# Altium PCB PCB1.PcbDoc
Units mil, origin at the board's own origin, x right, y up, seen from the top; angles counter-clockwise.
Board outline 2150 x 1580 mil, 2 copper layers (Top Layer, Bottom Layer); 11 components, 8 nets, 25 pads, 0 vias.
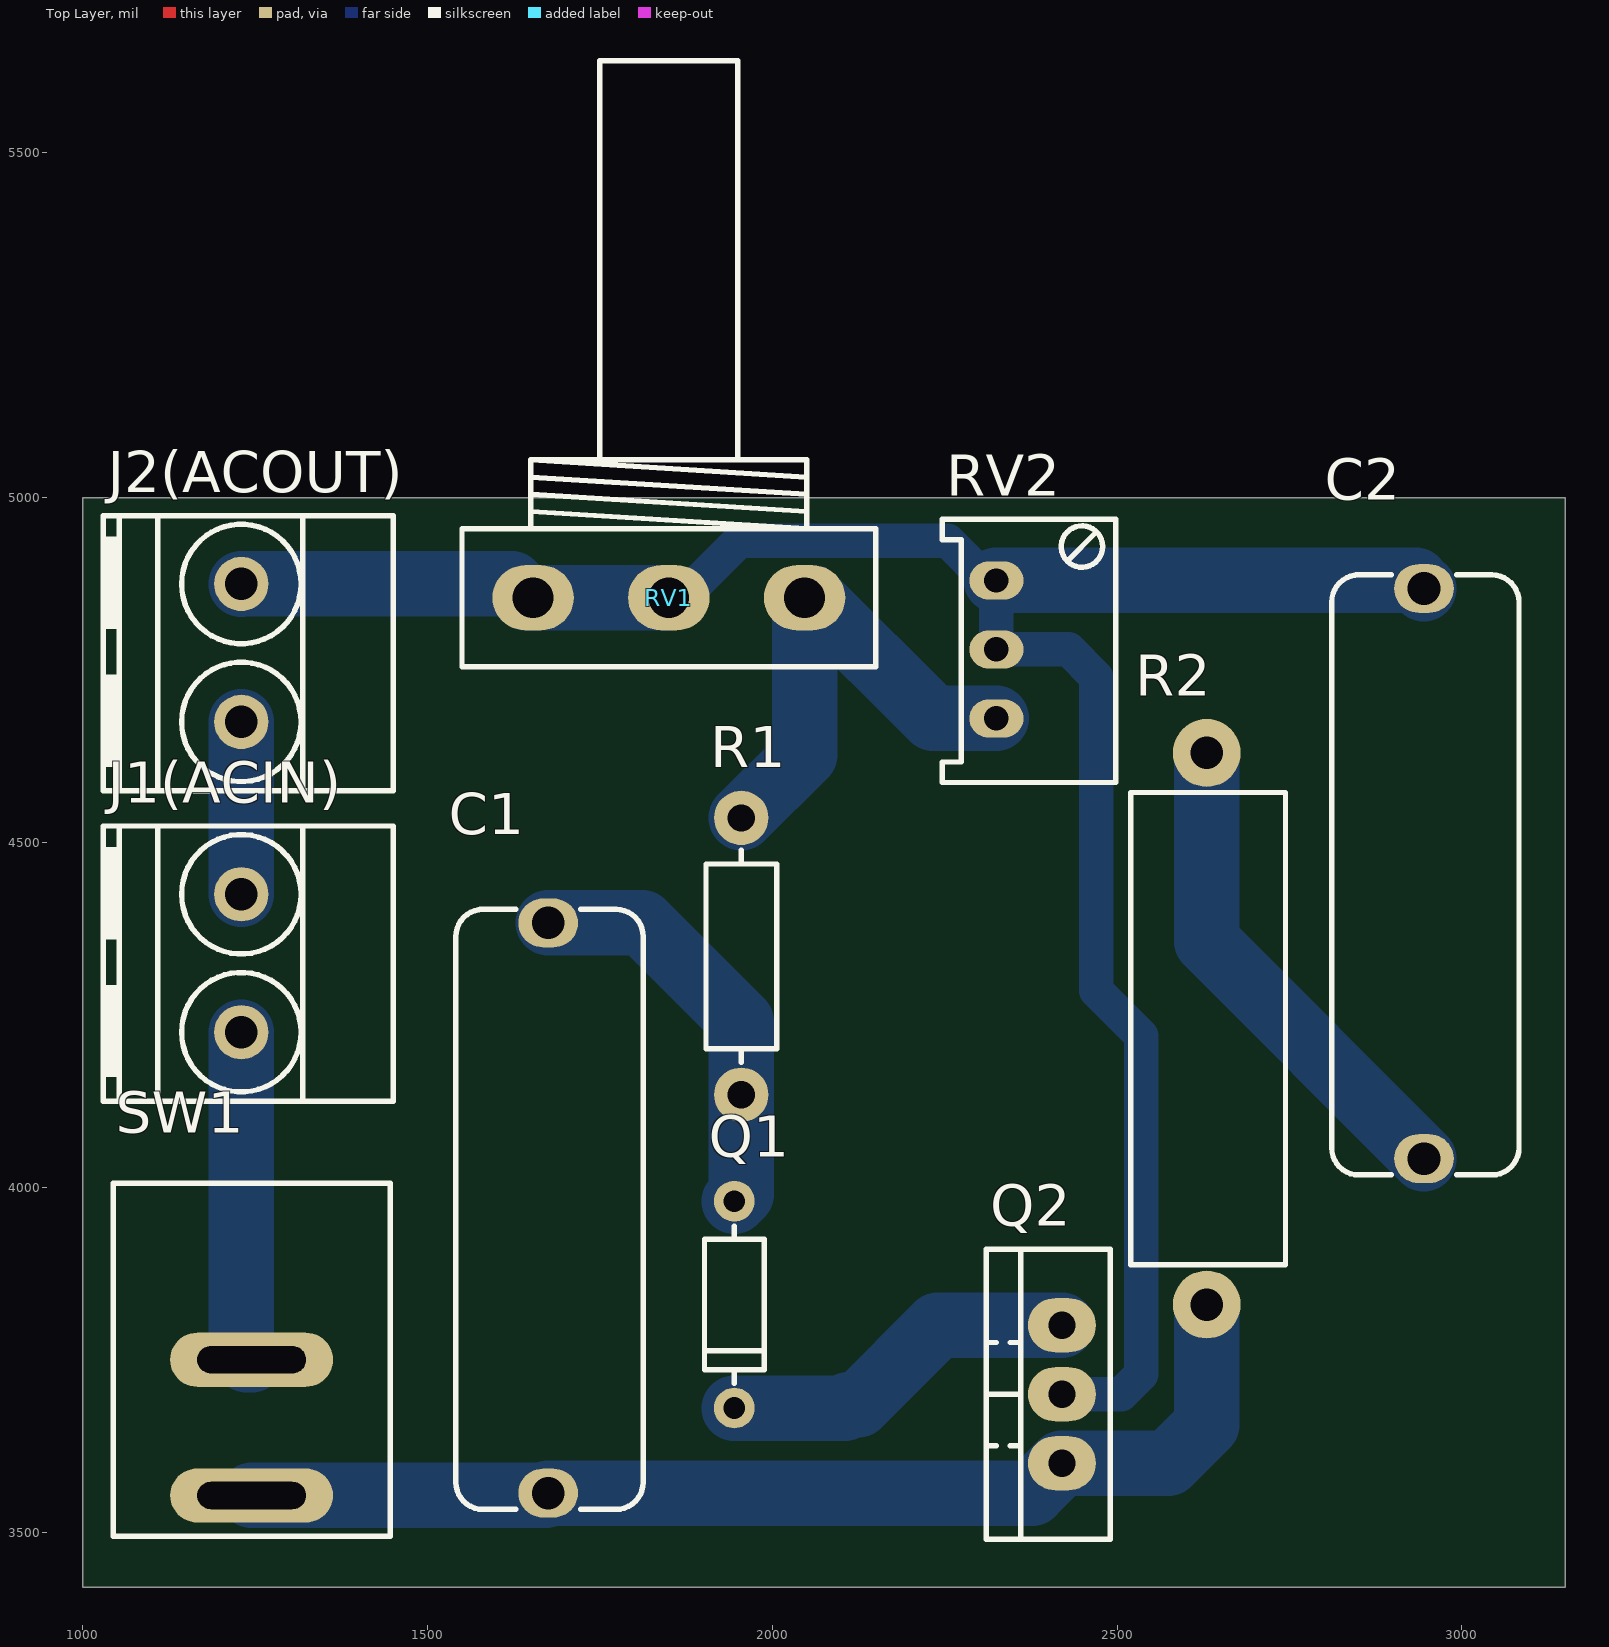
[diagram p0: Top Layer view]
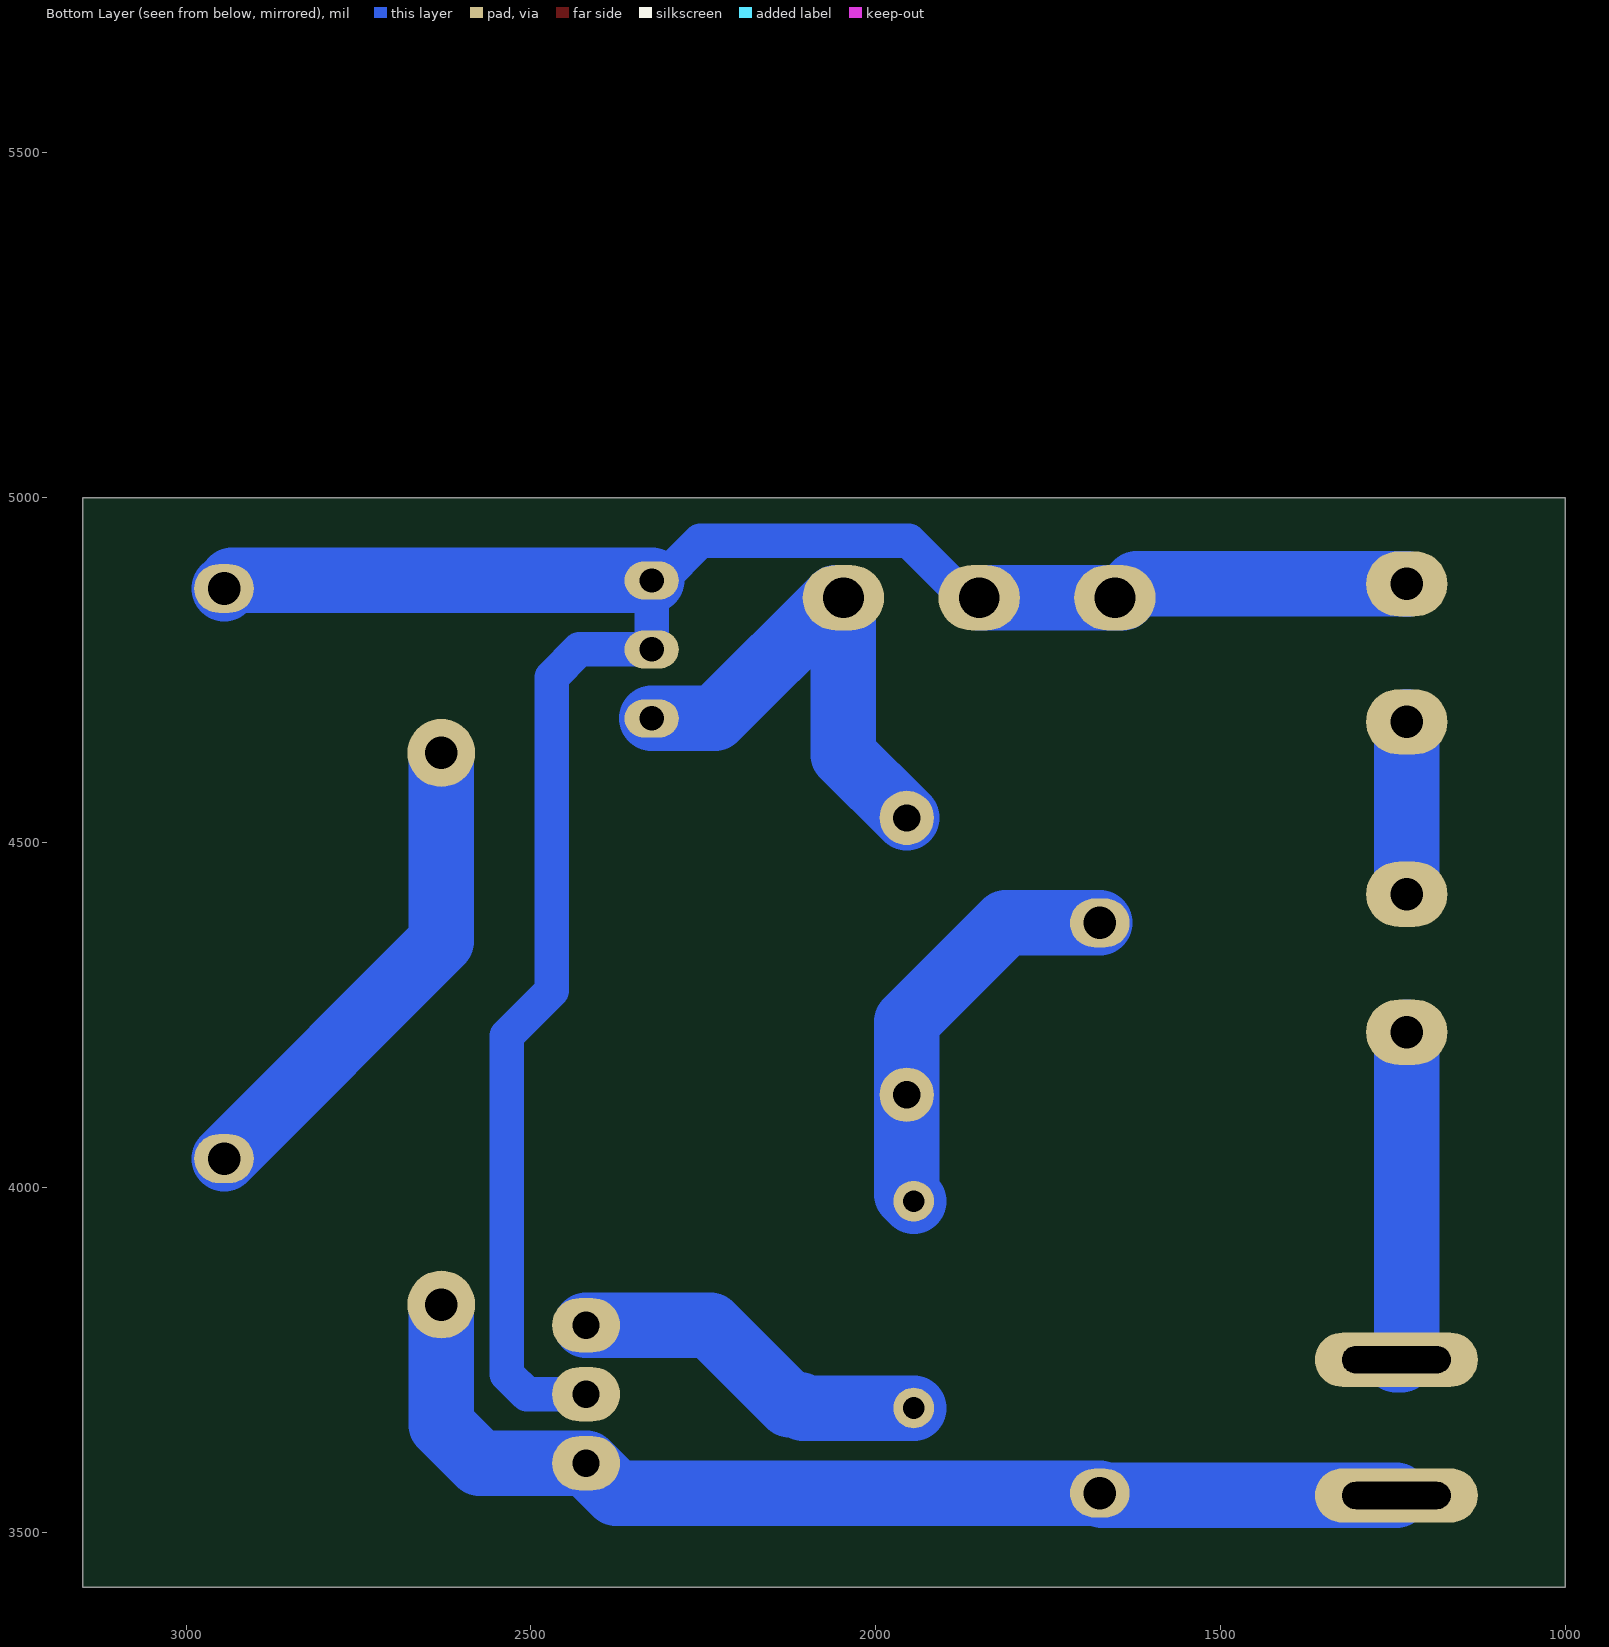
[diagram p1: Bottom Layer view, seen from below]
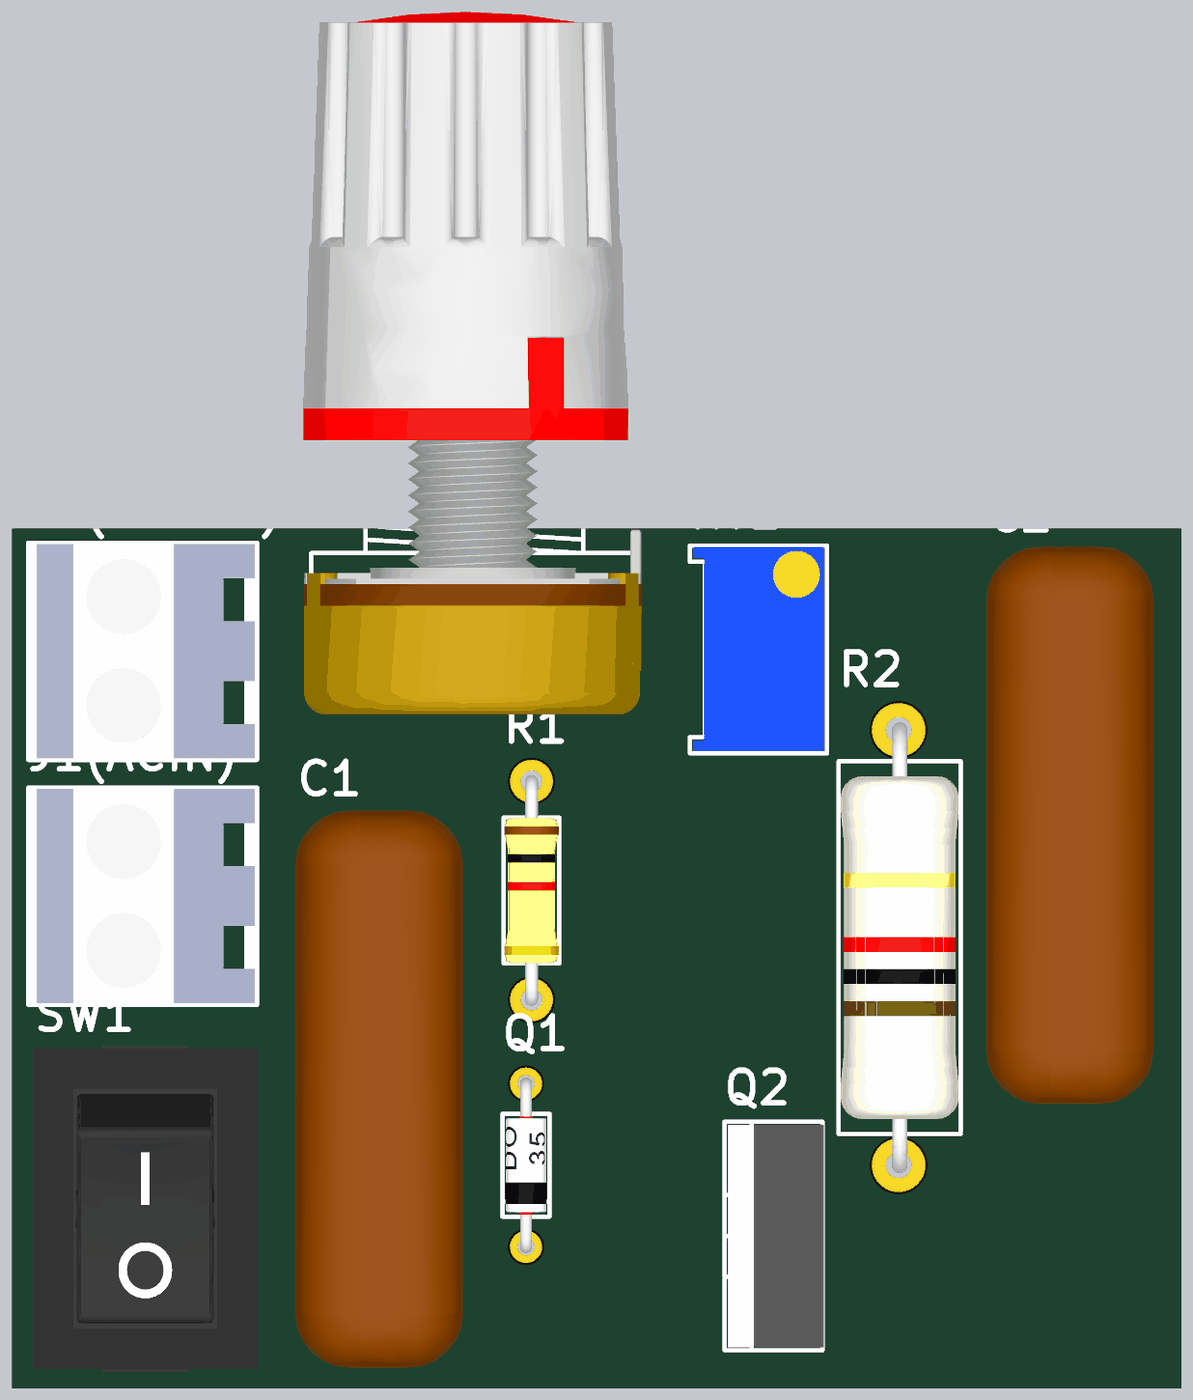
[diagram p2: 3D render of the assembled board from above, using the file's embedded part models]

## Layer stack, top to bottom
Top Solder: solder mask 0.4, Solder Resist, Dk 3.5
Top Layer: signal copper 1.4
Dielectric 1: dielectric 12.6, FR-4, Dk 4.8
Bottom Layer: signal copper 1.4
Bottom Solder: solder mask 0.4, Solder Resist, Dk 3.5

## Board outline
1000,3420 3150,3420 3150,5000 1000,5000

## Design rules (kind name [scope] priority, off if disabled: settings)
Clearance [All] p1: gap=10 ignorepadtopadclearanceinfootprint=FALSE
PolygonConnect [All] p1: connectstyle=Relief reliefconductorwidth=10 reliefentries=4 polygonreliefangle="90 Angle" airgapwidth=10
RoutingVias [All] p1: holewidth=28 width=50 viastyle="Through Hole" minholewidth=28 minwidth=50 maxholewidth=28 maxwidth=50
SolderMaskExpansion [All] p1: expansion=4 istentingtop=FALSE
Width [All] p1: maxlimit=95 minlimit=50 preferedwidth=65
30 further rules are at their usual default settings.

## Components (designator, comment, footprint, x,y, rotation, side; value= is the part's Value field where it differs from the comment)
C1 "100nF" C_FLM_22X7H14 1675,3970 r90 top
C2 "100nF" C_FLM_22X7H14 2945,4455 r90 top
J1(ACIN) "CONN_TB2" TBG_2 1230,4325 r90 top
J2(ACOUT) "CONN_TB2" TBG_2 1230,4775 r90 top
Q1 "DIAC" D_AX03_DO35 1945,3830 r270 top
Q2 "BTA16" TO220_3 2420,3700 r90 top
R1 "4.7K" R025W_AX04 1955,4335 r270 top
R2 "1002W" R2W_AX08 2630,4230 r90 top
RV1 "POT500K" VOL_R 1850,4855 r0 top
RV2 "Mol2M" POT_3296W 2325,4780 r270 top
SW1 "ToggleSwitch" SWRCK_SPST_S_15X10 1245,3750 r90 top

## Footprints (in the part's own frame and the unit in brackets; to place one, negate y for a bottom-side part, rotate by r counter-clockwise, add the part's x,y. Pads: shape width x height; smd on the part's side, far side on the other; paste and mask are expansions set on the pad)
C_FLM_22X7H14 [mm] "CAP, POLYESTER, 33.0X7.0mm pitch: 20.0mm, 0.68uF 400V"
  oval 1.8x2.2 hole 1.2: 1(-10.5,0) 2(10.5,0)
  silkscreen extent -11.1,-3.5 11,3.4, body extent -13,-3.9 13,3.9, height 19
D_AX03_DO35 [mm] "DIODE 0.3 INCH SPACING DO35"
  round 1.5 hole 0.8: 1(-3.81,0) 2(3.81,0)
  silkscreen extent -2.89,-1.1 2.89,1.1, body extent -4.09,-0.96 4.09,0.96, height 1.96
POT_3296W [mm] "POT, TRIM, 10.0X5.0mm, pitch: 2.5mm 3299W 3296W S64W"
  oval 1.4x2 / inner round 1.2 / far side oval 1.4x2 hole 0.9: 1(-2.54,0) 2(0,0) 3(2.54,0)
  silkscreen extent -4.8,-2 4.9,4.4, body extent -4.73,-1.85 4.8,4.25, height 11.56
R2W_AX08 [mm] "RESISTOR 2 WATT, AXIAL0.8"
  round 2.5 hole 1.2: 1(-10.16,0) 2(10.16,0)
  silkscreen extent -8.7,-2.9 8.7,2.8, body extent -10.51,-2.8 10.51,2.7, height 5.5
R025W_AX04 [mm] "RESISTOR 1/4 WATT, AXIAL0.4"
  round 2 hole 1: 1(-5.1,0) 2(5.1,0)
  silkscreen extent -3.9,-1.3 3.9,1.3, body extent -5.38,-1.28 5.38,1.28, height 2.6
SWRCK_SPST_S_15X10 [mm] "SWITCH Rocker, SPST, Straight, 15x10"
  oval 2x6 hole 1 slot 4 at 90 deg: 1(-5,0) 2(0,0)
  silkscreen extent -6.5,-5.1 6.5,5.1, body extent -7.6,-5.25 7.6,5.25, height 13.1
TBG_2 [mm] "Terminal Block Green"
  round 2 / inner round 2 / far side oval 2.4x3 hole 1.2: 1(-2.54,0) 2(2.54,0)
  silkscreen extent -5.08,-5.6 5.05,5.08, body extent -5,-5.5 5,5, height 14
TO220_3 [mm] "TO-220 3 LEAD, TO-262, pitch: 2.54mm  10x4.5mm"
  oval 2x2.5 hole 1: 1(-2.54,0) 2(0,0) 3(2.54,0)
  silkscreen extent -5.33,-1.78 5.33,2.79, body extent -5.2,-1.85 5.2,2.65, height 19
VOL_R [mm] "VOULME RIGHT ANGLE"
  oval 3x2.4 hole 1.5: 1(-5,0) 2(0,0) 3(5,0)
  silkscreen extent -7.62,-2.54 7.62,19.78, body extent -10.76,-5 10.93,27.8, height 24.54

## Part data
C1 C2: library part CAP_THD_FLM_0.33uF_400v, "CAP, THD, FILM,", ASSEMBLY=ASSEMBLY, DESC=DESCRIPTION, DIST#=MOUSER, MANF=MANF, MANF_P#=MANF_PART#, PARAM=20%, PARAM2=400V, PRICE="10= 5$"
J1(ACIN) J2(ACOUT): "CONN, TERMINAL BLOCK, 5.08mm pitch"
Q1: library part DIAC_DB3_DO35, "Diac, 32VBO, DO-35", MANF=ST, MANF_P#=DB3, PARAM="2A, -40~125oC", PARAM2=32VBO, PRICE=toman@PAYA
Q2: library part TRIAC_BTA16-800_TO220, "Triac, 800V, 16A, TO-220", MANF=ST, MANF_P#=BTA16-800CW, PRICE=1200toman@PAYA
R1 R2: library part RES_THD, "RESISTOR, THD", ASSEMBLY=ASSEMBLY, DESC=DESCRIPTION, DIST#=MOUSER, MANF="KOA SPEER", MANF_P#=RK73H1ETTP4701F, PARAM=0.063W, PARAM2=1%, PRICE="100= 0.5$"
RV1: library part RES_THD_POT_VOL, "RESISTOR, THD, Potentiometer Volume"
RV2: library part RES_THD_POT_3296W, "RESISTOR, THD, Potentiometer"
SW1: library part SWROK_SPST_R_15X10, "SWITCH, Rocker, SPST, THD, 15x10.5mm", ASSEMBLY=ASSEMBLY, DESC=DESCRIPTION, MANF=-, MANF_PART#=-, PARAM=-, PRICE=-

## Nets (pads, with @x,y where several pads share a name; then routed paths per layer and width w, separated by ;. In a path a pad name is that pad's centre, name@x,y a point inside that pad or via, vN(x,y) a via of type N, cw(c..) or ccw(c..) an arc to the next point about the centre after c; other vN are vias at no path point)
NetC1_1: C1.1 Q2.1 R2.1 SW1.1 | length 1601.8
  Bottom Layer w95: SW1.1 1671.54,3553.15 C1.1 2376.61,3556.61 Q2.1 2574.35,3600 2630,3655.65 R2.1
NetC1_2: C1.2 Q1.1 R1.2 | length 603.5
  Bottom Layer w95: C1.2 1811.61,4383.39 1955,4240 R1.2 1955,3990 Q1.1
NetC2_1: C2.1 R2.2 | length 718.9
  Bottom Layer w95: R2.2 2630,4356.61 C2.1
NetC2_2: C2.2 J2(ACOUT).2 Q2.2 RV1.1 RV1.2 RV2.1 RV2.2 | length 3212.6
  Bottom Layer w50: RV1.2 1869.69,4855 1952.19,4937.5 2254.3,4937.5 2311.8,4880 RV2.1 RV2.2 2430,4780 2470,4740 2470,4285 2535,4220 2535,3729.29 2505.71,3700 Q2.2
  Bottom Layer w95: 1230.11,4874.89 1230,4875 1621.85,4875 1641.85,4855 RV1.1 RV1.2 ; RV2.1 2933.38,4880 C2.2
NetJ1(ACIN)_1: J1(ACIN).1 SW1.2 | length 485.2
  Bottom Layer w95: 1230,4225 1230,3758.13 1238.13,3750 SW1.2
NetJ1(ACIN)_2: J1(ACIN).2 J2(ACOUT).1 | length 250
  Bottom Layer w95: 1230,4425 1230,4675
NetQ1_2: Q1.2 Q2.3 | length 524.7
  Bottom Layer w95: Q1.2 2105,3680 2110,3685 2125,3685 2240,3800 Q2.3
NetR1_1: R1.1 RV1.3 RV2.3 | length 707.9
  Bottom Layer w95: R1.1 2046.85,4627.64 RV1.3 2058.15,4855 2233.15,4680 RV2.3